# Altium PCB base.PcbDoc
Units mil, origin at the board's own origin, x right, y up, seen from the top; angles counter-clockwise.
Board outline 2085 x 1905 mil, 2 copper layers (Top Layer, Bottom Layer); 14 components, 0 nets, 121 pads, 12 vias.
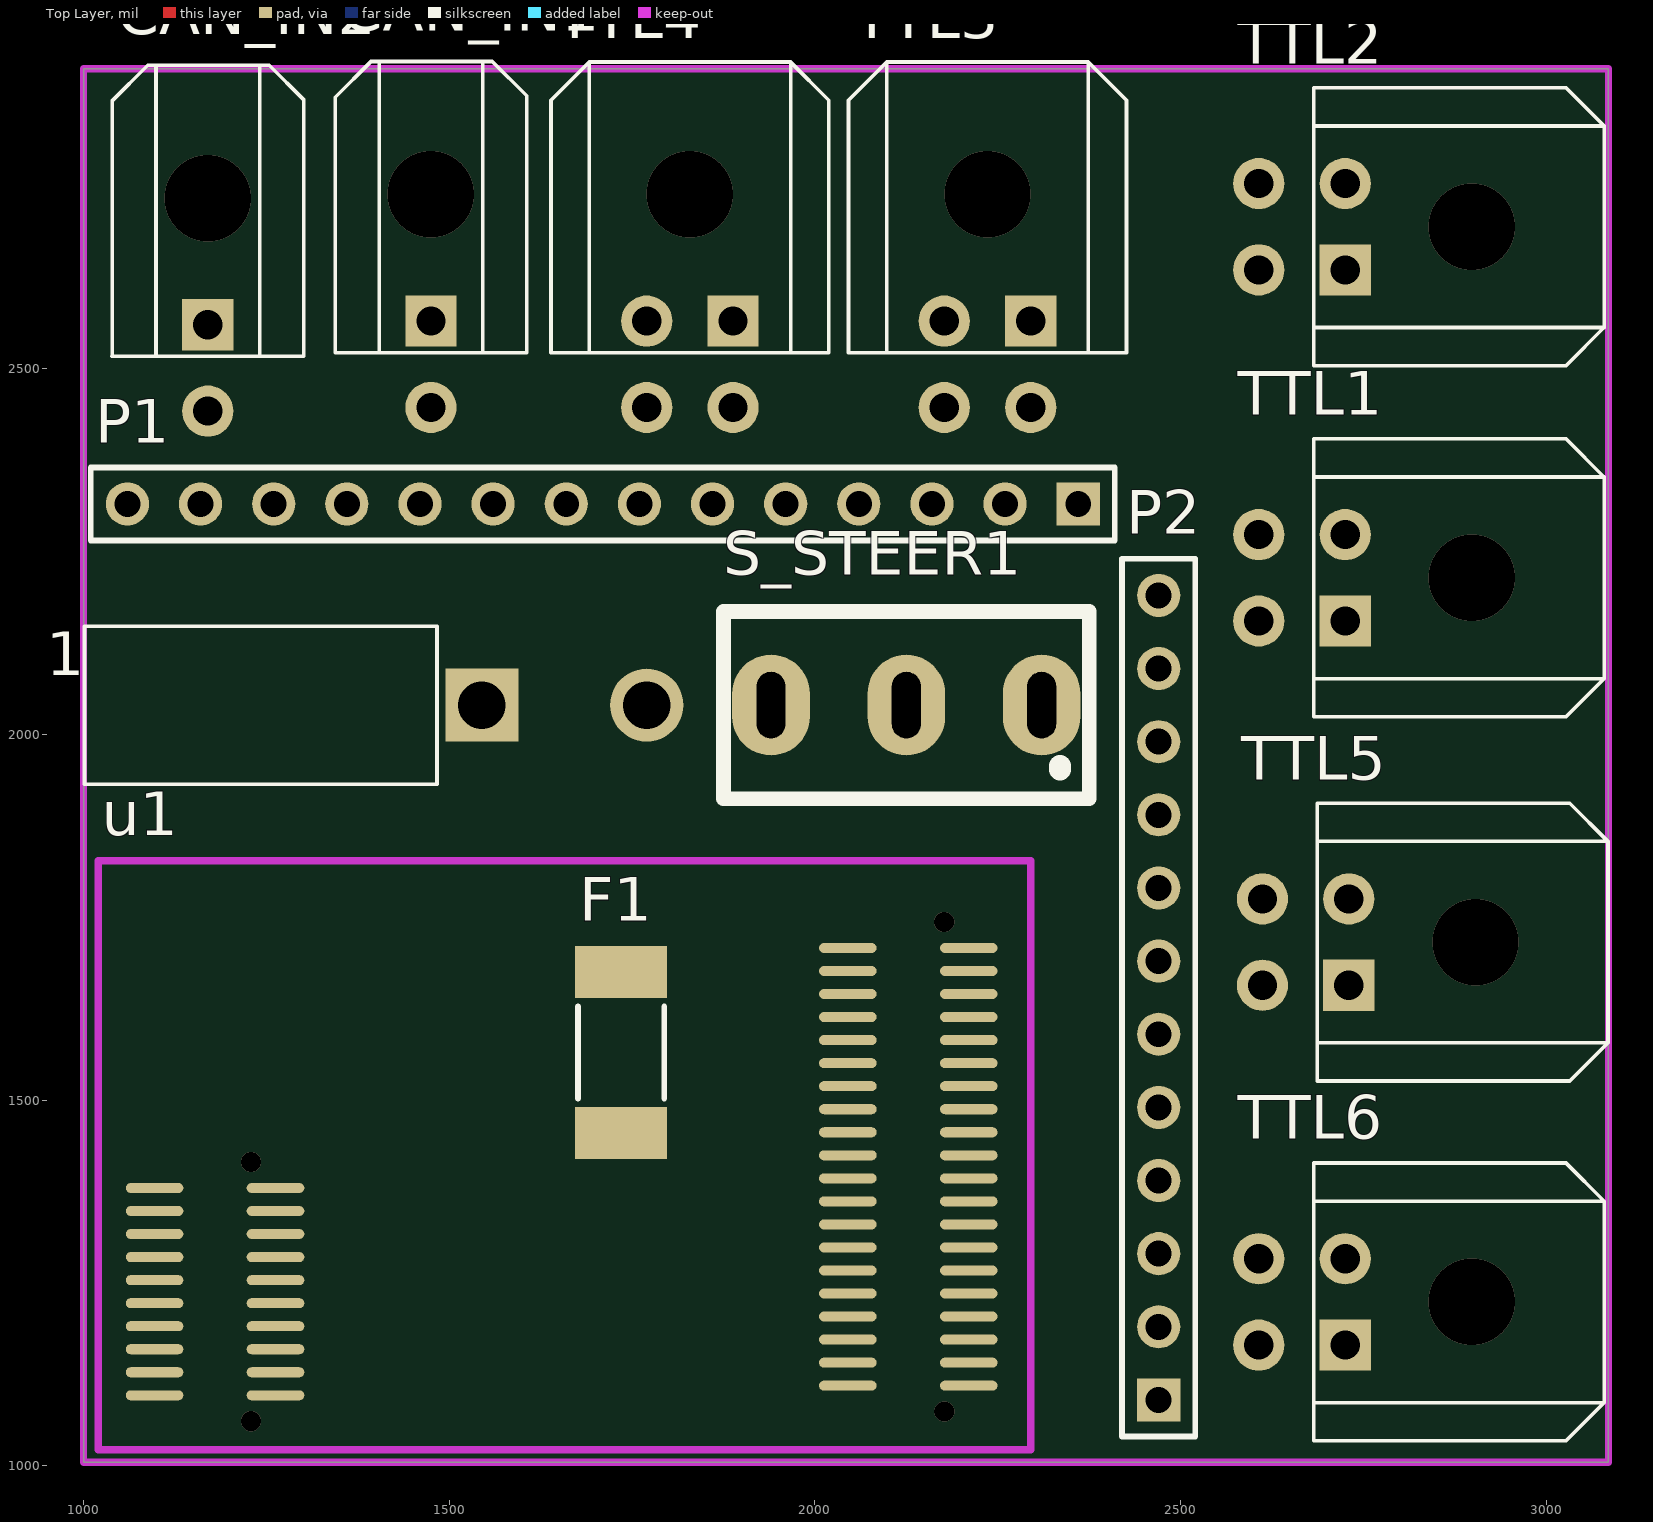
[diagram p0: Top Layer view]
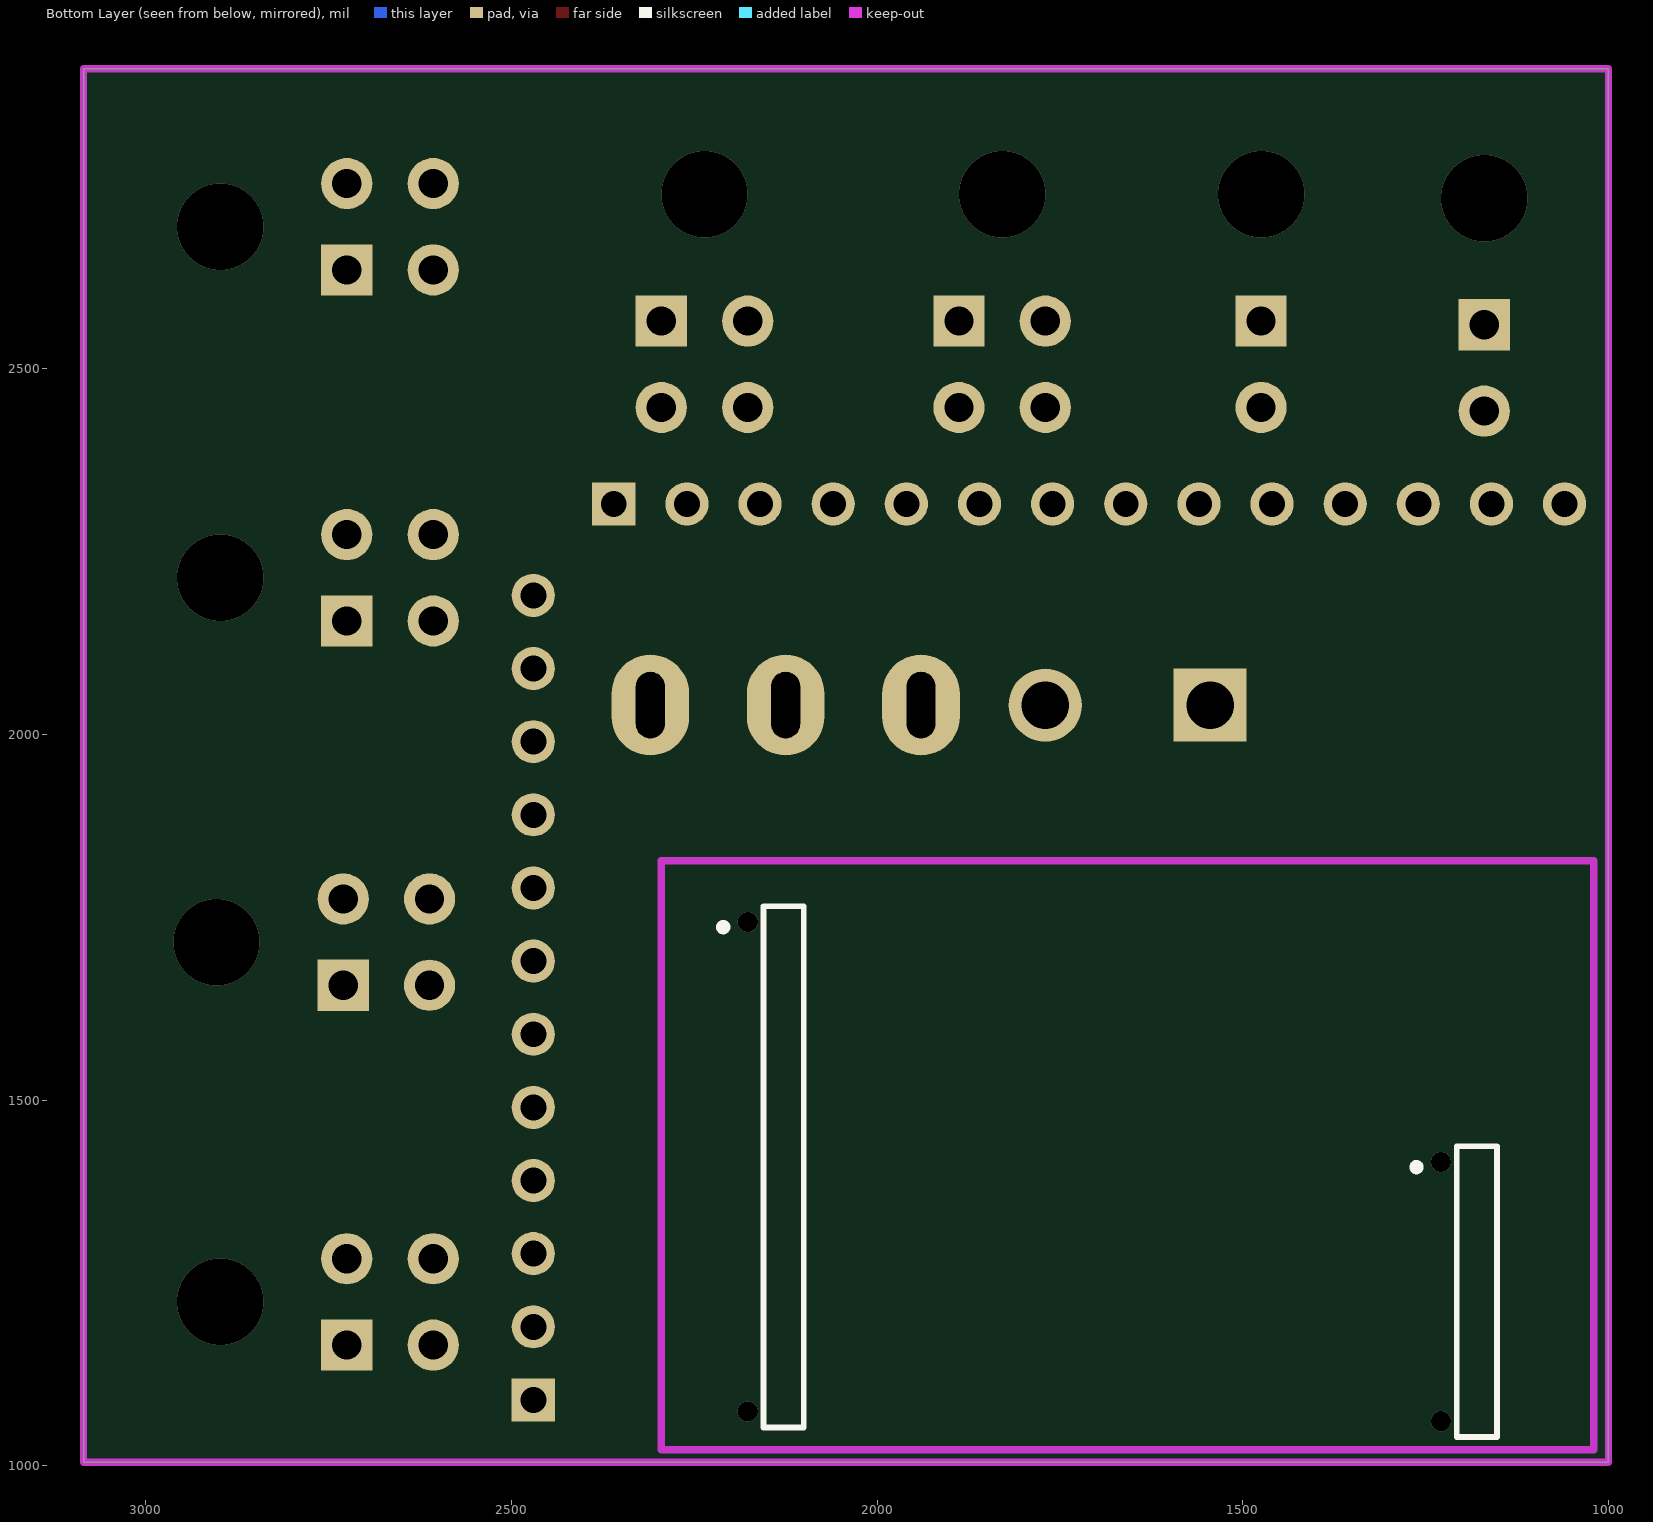
[diagram p1: Bottom Layer view, seen from below]

## Layer stack, top to bottom
Top Solder: solder mask 0.4, Solder Resist, Dk 3.5
Top Layer: signal copper 1.4
Dielectric 1: dielectric 12.6, FR-4, Dk 4.8
Bottom Layer: signal copper 1.4
Bottom Solder: solder mask 0.4, Solder Resist, Dk 3.5

## Board outline
1000,1005 3085,1005 3085,2910 1000,2910

## Design rules (kind name [scope] priority, off if disabled: settings)
Clearance [All] p1: gap=10 ignorepadtopadclearanceinfootprint=FALSE except(0: Arc-Hole Track-Hole SMDPad-Hole THPad-Hole Via-Hole Fill-Hole Poly-Hole Region-Hole Text-Hole)
PolygonConnect [All] p1: connectstyle=Relief reliefconductorwidth=10 reliefentries=4 polygonreliefangle="90 Angle" airgapwidth=10
RoutingVias [All] p1: holewidth=28 width=50 viastyle="Through Hole" minholewidth=28 minwidth=50 maxholewidth=28 maxwidth=50
SolderMaskExpansion [All] p1: expansion=4 istentingtop=FALSE
Width [All] p1: maxlimit=10 minlimit=10 preferedwidth=10
30 further rules are at their usual default settings.

## Components (designator, comment, footprint, x,y, rotation, side; value= is the part's Value field where it differs from the comment)
1 "MX4.2_1x2" MX4.2_1x2 1657.4,2040 r270 top
CAN_IN1 "MX3.0-2*1P" MX3.0-2*1P 1475,2505.94 r180 top
CAN_IN2 "MX3.0-2*1P" MX3.0-2*1P 1170,2500.94 r180 top
F1 "FUSE" 2512 1735,1565 r90 top
P1 "Header 14" HDR1X14 2360,2315 r180 top
P2 "Header 12" HDR1X12 2470,1090 r90 top
S_STEER1 "Switch_li" Switch_li 2375,1912.05 r90 top
TTL1 "MX3.0-2*2P" MX3.0-2*2P 2665.94,2214.05 r90 top
TTL2 "MX3.0-2*2P" MX3.0-2*2P 2665.94,2694.05 r90 top
TTL3 "MX3.0-2*2P" MX3.0-2*2P 2235.95,2505.94 r180 top
TTL4 "MX3.0-2*2P" MX3.0-2*2P 1829.06,2505.94 r180 top
TTL5 "MX3.0-2*2P" MX3.0-2*2P 2670.94,1715.94 r90 top
TTL6 "MX3.0-2*2P" MX3.0-2*2P 2665.94,1224.05 r90 top
u1 "f405-bord" f405-bord 1621.85,1401.86 r0 top

## Footprints (in the part's own frame and the unit in brackets; to place one, negate y for a bottom-side part, rotate by r counter-clockwise, add the part's x,y. Pads: shape width x height; smd on the part's side, far side on the other; paste and mask are expansions set on the pad)
2512 [mm]
  rect 1.8x3.2 smd: 1(-2.8,0) 2(2.8,0)
  silkscreen extent -1.6,-1.5 1.6,1.5
f405-bord [mm]
  oval 2x0.35 smd: 1(14.948,7.775) 2(14.948,6.975) 3(14.948,6.175) 4(14.948,5.375) 5(14.948,4.575) 6(14.948,3.775) 7(14.948,2.975) 8(14.948,2.175) 9(14.948,1.375) 10(14.948,0.575) 11(14.948,-0.225) 12(14.948,-1.025) 13(14.948,-1.825) 14(14.948,-2.625) 15(14.948,-3.425) 16(14.948,-4.225) 17(14.948,-5.025) 18(14.948,-5.825) 19(14.948,-6.625) 20(14.948,-7.425) 21(10.748,-7.425) 22(10.748,-6.625) 23(10.748,-5.825) 24(10.748,-5.025) 25(10.748,-4.225) 26(10.748,-3.425) 27(10.748,-2.625) 28(10.748,-1.825) 29(10.748,-1.025) 30(10.748,-0.225) 31(10.748,0.575) 32(10.748,1.375) 33(10.748,2.175) 34(10.748,2.975) 35(10.748,3.775) 36(10.748,4.575) 37(10.748,5.375) 38(10.748,6.175) 39(10.748,6.975) 40(10.748,7.775) 41(-9.127,-0.561) 42(-9.127,-1.361) 43(-9.127,-2.161) 44(-9.127,-2.961) 45(-9.127,-3.761) 46(-9.127,-4.561) 47(-9.127,-5.361) 48(-9.127,-6.161) 49(-9.127,-6.961) 50(-9.127,-7.761) 51(-13.327,-7.761) 52(-13.327,-6.961) 53(-13.327,-6.161) 54(-13.327,-5.361) 55(-13.327,-4.561) 56(-13.327,-3.761) 57(-13.327,-2.961) 58(-13.327,-2.161) 59(-13.327,-1.361) 60(-13.327,-0.561)
  Keep-Out Layer lines w0.254: -15.287,-9.648 -15.287,10.799 17.098,10.799 17.098,-9.648 -15.287,-9.648
  body extent -13.68,-9.12 13.95,9.22, height 6
HDR1X12 [mm] "Connector; Header; 12 Position"
  rect 1.5x1.5 hole 0.9: 1(0,0)
  round 1.5 hole 0.9: 2(2.54,0) 3(5.08,0) 4(7.62,0) 5(10.16,0) 6(12.7,0) 7(15.24,0) 8(17.78,0) 9(20.32,0) 10(22.86,0) 11(25.4,0) 12(27.94,0)
  silkscreen extent -1.27,-1.27 29.21,1.27
HDR1X14 [mm] "Connector; Header; 14 Position"
  rect 1.5x1.5 hole 0.9: 1(0,0)
  round 1.5 hole 0.9: 2(2.54,0) 3(5.08,0) 4(7.62,0) 5(10.16,0) 6(12.7,0) 7(15.24,0) 8(17.78,0) 9(20.32,0) 10(22.86,0) 11(25.4,0) 12(27.94,0) 13(30.48,0) 14(33.02,0)
  silkscreen extent -1.27,-1.27 34.29,1.27
MX3.0-2*1P [mil]
  rect 70x70 hole 40: 1(0,-59.06)
  round 70 hole 40: 2(0,59)
  silkscreen extent -131,-414 131,-16
MX3.0-2*2P [mil]
  rect 70x70 hole 40: 1(-59.05,-59.06)
  round 70 hole 40: 2(-59.05,59.05) 3(59.06,59.05) 4(59.06,-59.06)
  silkscreen extent -190,-413 190,-16
MX4.2_1x2 [mil]
  rect 100x100 hole 65: 1(0,-112.6)
  round 100 hole 65: 2(0,112.6)
  silkscreen extent -108,-656 108,-174
Switch_li [mm]
  oval 3.5x2.7 hole 1 slot 2.3 at 0 deg: 1(3.25,1.65) 2(3.25,6.35) 3(3.25,11.05)
  silkscreen extent 0,0 6.5,12.7

## Part data
F1: library part Fuse
P1: "Header, 14-Pin", LatestRevisionDate=17-Jul-2002, LatestRevisionNote="Re-released for DXP Platform.", Publisher="Altium Limited"
P2: "Header, 12-Pin", LatestRevisionDate=17-Jul-2002, LatestRevisionNote="Re-released for DXP Platform.", Publisher="Altium Limited"

## Via types
v1: diameter 118.11, hole 118.11, Top Layer to Bottom Layer, 8 vias
v2: diameter 27.56, hole 27.56, Top Layer to Bottom Layer, 4 vias

## Nets (pads, with @x,y where several pads share a name; then routed paths per layer and width w, separated by ;. In a path a pad name is that pad's centre, name@x,y a point inside that pad or via, vN(x,y) a via of type N, cw(c..) or ccw(c..) an arc to the next point about the centre after c; other vN are vias at no path point)
pads on no net: 1.1 1.2 CAN_IN1.1 CAN_IN1.2 CAN_IN2.1 CAN_IN2.2 F1.1 F1.2 P1.1 P1.2 P1.3 P1.4 P1.5 P1.6 P1.7 P1.8 P1.9 P1.10 P1.11 P1.12 P1.13 P1.14 P2.1 P2.2 P2.3 P2.4 P2.5 P2.6 P2.7 P2.8 P2.9 P2.10 P2.11 P2.12 S_STEER1.1 S_STEER1.2 S_STEER1.3 TTL1.1 TTL1.2 TTL1.3 TTL1.4 TTL2.1 TTL2.2 TTL2.3 TTL2.4 TTL3.1 TTL3.2 TTL3.3 TTL3.4 TTL4.1 TTL4.2 TTL4.3 TTL4.4 TTL5.1 TTL5.2 TTL5.3 TTL5.4 TTL6.1 TTL6.2 TTL6.3 TTL6.4 u1.1 u1.2 u1.3 u1.4 u1.5 u1.6 u1.7 u1.8 u1.9 u1.10 u1.11 u1.12 u1.13 u1.14 u1.15 u1.16 u1.17 u1.18 u1.19 u1.20 u1.21 u1.22 u1.23 u1.24 u1.25 u1.26 u1.27 u1.28 u1.29 u1.30 u1.31 u1.32 u1.33 u1.34 u1.35 u1.36 u1.37 u1.38 u1.39 u1.40 u1.41 u1.42 u1.43 u1.44 u1.45 u1.46 u1.47 u1.48 u1.49 u1.50 u1.51 u1.52 u1.53 u1.54 u1.55 u1.56 u1.57 u1.58 u1.59 u1.60
copper on no net:
  other v1: 2898.23,1224.05 2903.23,1715.94 2898.23,2214.05 2898.23,2694.05 1170,2733.23 1475,2738.23 1829.06,2738.23 2235.95,2738.23
  other v2: 1229.04,1060.89 2176.89,1074.09 1229.04,1415.22 2176.89,1743.39

## Keep-outs
Keep-Out Layer:
  the board outline again, w10